# Altium PCB PV_PCB.PcbDoc (part 2 of 2)
Units mil, origin at the board's own origin, x right, y up, seen from the top; angles counter-clockwise.
Board outline 6100 x 4165 mil, 2 copper layers (Top Layer, Bottom Layer), stack 12.8 mil thick; 137 components, 94 nets, 414 pads, 55 vias.
Unrouted connection lines stored in the file: 34.
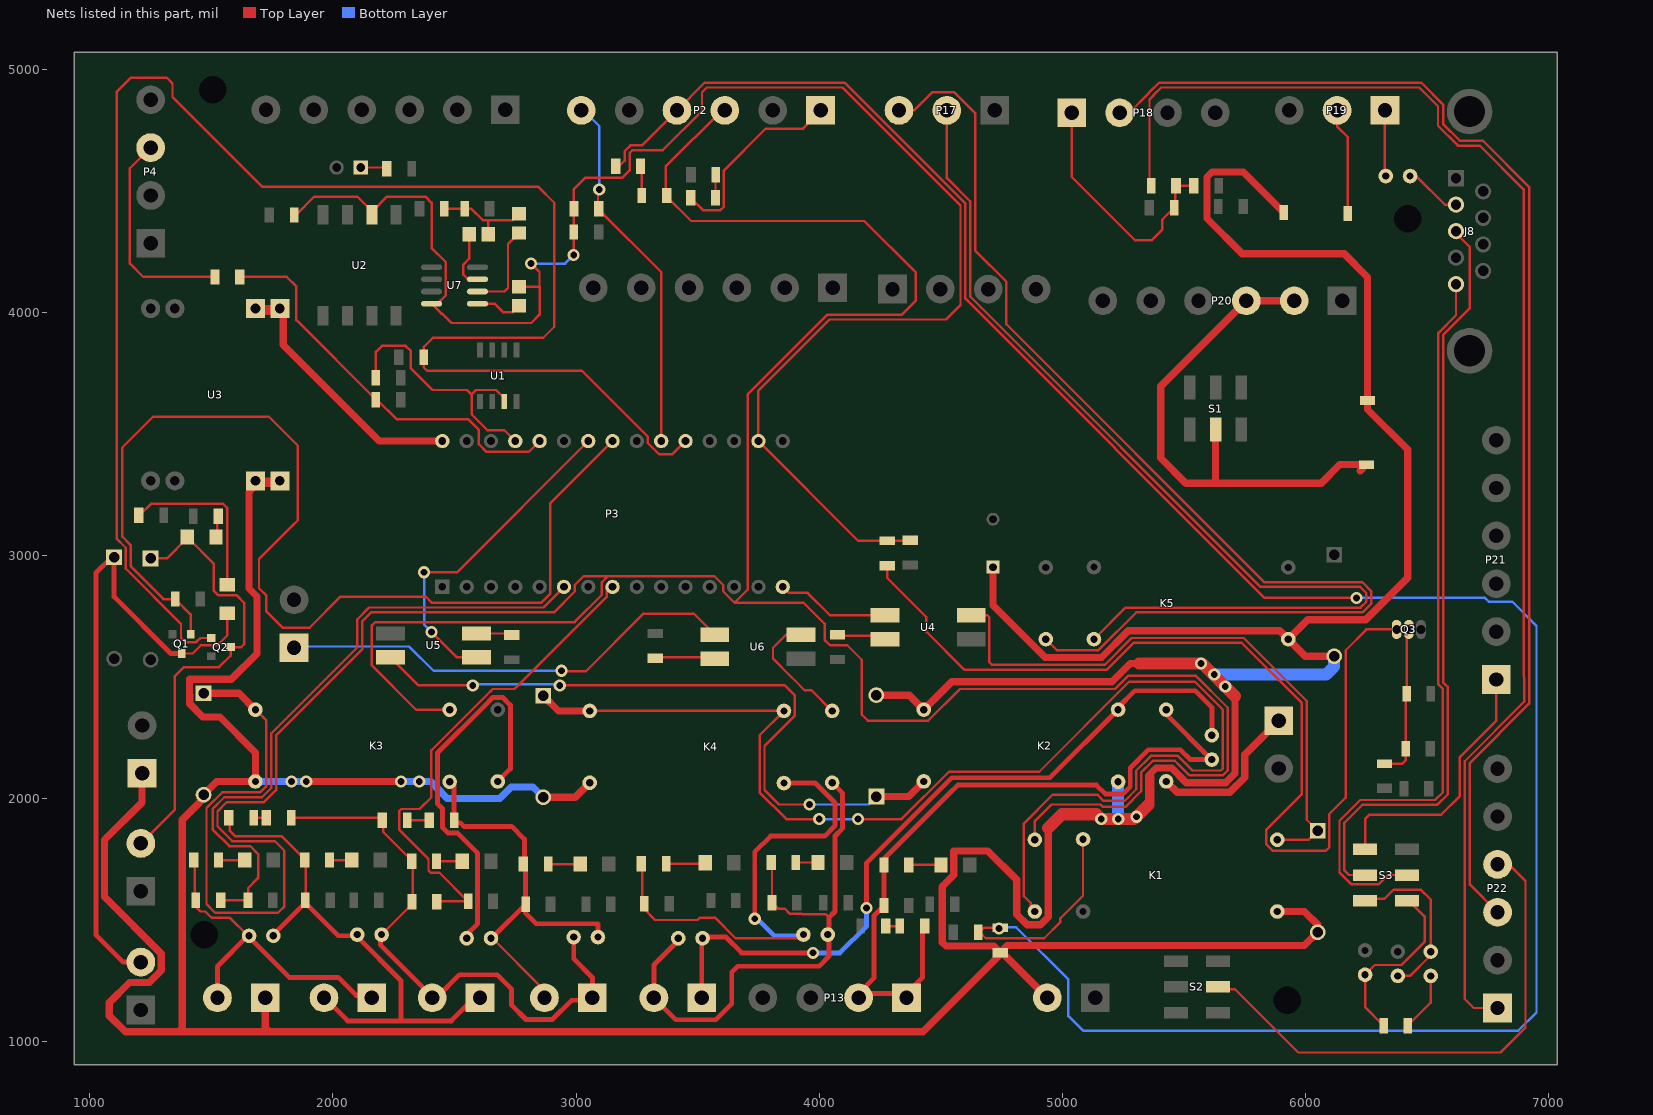
[diagram p2: the nets of this part, all layers, seen from the top]

## Via types
v1: diameter 50, hole 28, Top Layer to Bottom Layer, 55 vias

## Nets (pads, with @x,y where several pads share a name; then routed paths per layer and width w, separated by ;. In a path a pad name is that pad's centre, name@x,y a point inside that pad or via, vN(x,y) a via of type N, cw(c..) or ccw(c..) an arc to the next point about the centre after c; other vN are vias at no path point) (continued)
IMD_Status: P10.1 U6.1 | length 1908.8
  Top Layer w10: v1(2940,2525) 2941.72,2523.28 3040,2523.28 3276.72,2760 3484.09,2760 U6.1@3570.67,2673.43
  Bottom Layer w10: P10.1@1840,2620 1881.85,2620 1886.85,2625 2313.43,2625 2413.43,2525 v1(2940,2525)
LIM_MCU: P2.6 P3.21 R1.1 | length 1530.4
  Top Layer w10: v1(3095,4505) 3090,4500 3090,4425 3350,4165 P3.21@3350,3470 P3.21@3325,3470
  Bottom Layer w10: P2.6@3021.3,4830 3030,4830 3095,4765 v1(3095,4505)
LV_BATT+: C12.1 D6.2 D12.2 D13.2 D14.2 D16.2 F1.2 F2.2 K1.1 K2.1 K2.5 K3.2 K4.2 K5.1 P5.1 P11.1 P25.2 R37.1 U3.1 | length 21815.5
  Top Layer w20: D13.2@1467.87,2015.14 D13.2@1475,2008.01
  Top Layer w30: P5.1@1215,2103.15 1215,1984.5 1060,1829.5 1060,1595.72 1294.06,1361.67 1294.06,1292.03 1244.82,1242.8 1162.8,1242.8 1080,1160 1080,1106.53 1146.53,1040 1365,1040 ; D13.2@1467.87,2015.14 1522.45,2069.72 K3.2@1681,2069.72 1681,2189 1535,2335 1465.01,2335 1410.39,2389.63 1410.39,2426.59 1409.94,2427.03 1409.94,2489.94 1581.85,2489.94 1687.34,2595.43 1687.34,2830.81 1655,2863.15 1655,3260 U3.1@1695,3300 ; D13.2@1475,2008.01 1425,1958.01 1425,1957.57 1380,1912.57 1380,1055 1365,1040 ; P11.1@1721.85,1180 1721.85,1058.15 1740,1040 ; v1(1890,2070) v1(2280,2070) ; D14.2@2865,2005 2996.28,2005 K4.2@3056,2064.72 ; D12.2@4235,2425 4370.28,2425 K2.1@4430,2365.28 4544.72,2480 5203.99,2480 5278.99,2555 5315,2555 ; C12.1@4715,2951.57 4715,2794.23 4929.23,2580 5161.07,2580 5271.07,2690 5894,2690 K5.1@5929,2655 ; P25.2@4938.15,1180 R37.1@4748.15,1370 ; 4942.02,1878.22 4942.02,1512.22 4909.8,1480 4855,1480 4812,1523 4812,1665.01 4693.5,1783.5 4553.5,1783.5 4553.5,1684.72 4506.38,1637.59 4506.38,1408.14 4521.02,1393.5 4717.56,1393.5 R37.1@4745,1366.06 ; 5353.99,2093.99 5385,2125 5449.78,2125 5509.78,2065 5671.92,2065 5680.71,2073.79 5710,2103.08 5710,2420 ; v1(5570,2555) v1@5575,2555 ; K1.1@5884,1535 5995,1535 6050,1480 D6.2@6050,1450 5995,1395 4773.15,1395 R37.1@4748.15,1370 ; F2.2@5910,4410 5743.5,4576.5 5615.35,4576.5 5595,4556.15 5595,4385 5740,4240 6159.02,4240 6255,4144.02 F1.2@6255,3636.89 6255,3600 6420,3435 6420,2907.72 6247.28,2735 6009,2735 K5.1@5929,2655 ; D16.2@6117.87,2585.14 5998.86,2585.14 K5.1@5929,2655 ; 1365,1040 1740,1040 ; 1740,1040 4427.11,1040 4745,1357.89 R37.1@4745,1366.06 ; R37.1@4745,1366.06 4745,1370 R37.1@4748.15,1370
  Top Layer w40: U3.1@1695,3300 U3.1@1795,3300 ; 5353.99,1973.99 5358.99,1978.99 5358.99,2088.99
  Top Layer w50: 4942.02,1878.22 4998.79,1935 5140,1935 v1(5160,1915) v1(5230,1915) 5295,1915 v1(5305,1925) 5353.99,1973.99 ; 5315,2555 v1(5570,2555) ; v1@5575,2555 v1(5670,2460) 5710,2420
  Bottom Layer w30: K3.2@1681,2069.72 1839.72,2069.72 v1@1839.45,2070 ; v1(1830,2070) v1@1839.45,2070 ; v1@1899.72,2070 v1(1890,2070) v1@1839.45,2070 ; v1(2280,2070) v1(2355,2070) 2402.22,2070 2424.99,2047.23 2424.99,2045.6 2470.6,2000 2686.06,2000 2733,2046.94 2823.06,2046.94 D14.2@2865,2005
  Bottom Layer w50: v1@5228.99,1916.01 K2.5@5228.99,2068.66 ; v1(5625,2510) 6085,2510 6117.87,2542.87 D16.2@6117.87,2585.14
MC_RX: P19.1 P28.1 | length 283
  Top Layer w10: P28.1@6340,4575 6326.85,4588.15 P19.1@6326.85,4820.65 ; P19.1@6326.85,4820.65 6317.5,4820.65 6326.85,4830 P19.1@6326.85,4820.65
MC_TX: P21.1 S3.4 | length 1102.3
  Top Layer w10: S3.4@6245,1783.43 6245,1915 6263.5,1933.5 6558.11,1933.5 6635,2010.39 6635,2170 6785,2320 P21.1@6785,2489.45
MCU_HV_EN: P3.24 U5.1 | length 1385.4
  Top Layer w10: v1(2375,2930) 2510,2930 P3.24@3050,3470 ; v1(2405,2685) 2510,2580 U5.1@2590.79,2580
  Bottom Layer w10: v1(2375,2930) 2375,2715 v1(2405,2685)
MOTOR_TEMP: C9.2 P18.1 R44.1 R45.1 | length 1046.5
  Top Layer w10: P18.1@5038.78,4820 5038.78,4556.22 5300,4295 5366.57,4295 5410,4338.43 5410,4380 C9.2@5460,4430 5463.43,4433.43 5463.43,4520 R45.1@5545,4520
MSTR_SW_FDBK: P3.6 R25.1 R26.2 | length 2659.1
  Top Layer w10: R25.1@1534.21,1581.57 R26.2@1650.79,1581.57 1650.79,1630.79 1692.28,1672.28 1692.28,1771.29 1659.63,1803.94 1573.92,1803.94 1505,1872.86 1505,1956.84 1552.88,2004.72 1707.92,2004.72 1746,2042.8 1746,2267.57 2100,2621.57 2100,2736.62 2148.86,2785.47 2865.47,2785.47 P3.6@2950,2870
NetC2_2: C2.2 R4.2 | length 122.1
  Top Layer w10: R4.2@3265,4600 3270,4595 C2.2@3270,4480
NetC4_2: C4.2 R6.2 | length 95.7
  Top Layer w10: C4.2@3573.43,4470 3573.43,4563.43 R6.2@3575,4565
NetC5_1: C5.1 J1.1 J3.2 P8.1 P12.2 R19.1 R23.2 | length 2181.2
  Top Layer w10: C5.1@1575,1920 1575,1867.87 1598.94,1843.94 1790,1843.94 1887.36,1746.57 1887.36,1583.15 R23.2@1885.79,1581.57 R23.2@1885.79,1570.79
  Top Layer w20: J3.2@1750,1435 1885.79,1570.79 2021.57,1435 2095,1435 2280,1250 2280,1085 ; P12.2@1955,1190 2060,1085 2280,1085 ; P8.1@2579.17,1177.32 2486.85,1085 2280,1085
NetC5_2: C5.2 R15.1 | length 56.6
  Top Layer w10: C5.2@1673.43,1920 R15.1@1730,1920
NetC6_1: C6.1 J1.2 J2.1 P8.2 P9.1 R15.2 R22.1 R27.2 | length 2439.2
  Top Layer w10: R15.2@1828.43,1920 2196.57,1920 2206.57,1910 2206.57,1862.36 2327.36,1741.57 R27.2@2327.36,1575 ; J1.2@2195,1435 2325,1565 R27.2@2325,1575
  Top Layer w20: J1.2@2195,1435 2195,1398.15 2408.15,1185 2430,1185 2520,1275 2675,1275 2735,1215 2735,1150 2794.06,1090.94 2902.75,1090.94 2981.8,1170 3066.85,1170 3066.85,1263.7 2990.28,1340.28 J2.1@2990.28,1435
NetC6_2: C6.2 R16.1 | length 95
  Top Layer w10: C6.2@2305,1910 R16.1@2400,1910
NetC7_2: C7.2 R32.1 | length 61.6
  Top Layer w10: R32.1@4270,1475 C7.2@4331.57,1475
NetD1_1: D1.1 D3.2 P6.2 Q1.D | length 2676.9
  Top Layer w10: D1.1@1090,2992.32 D1.1@1100,2992.32 ; Q1.D@1377.4,2596.26 1423.41,2596.26 1456.4,2629.25 1523.93,2629.25 1565,2670.32 D3.2@1565,2770.79
  Top Layer w20: D1.1@1090,2992.32 1025,2927.32 1025,1440 1138.15,1326.85 P6.2@1210,1326.85 ; D1.1@1100,2992.32 1100,2829.06 1332.8,2596.26 Q1.D@1377.4,2596.26
NetD2_1: D2.1 D4.2 P7.2 Q2.D | length 1872.4
  Top Layer w10: P7.2@1210,1815 1350,1955 1350,2503.28 1386.66,2539.94 1531.66,2539.94 1578.74,2587.02 Q2.D@1578.74,2622.6 1622.6,2622.6 1635,2635 1635,2804.21 1602.71,2836.5 1527.29,2836.5 1510,2853.79 1510,2965 1402.5,3072.5 1317.32,2987.32 D2.1@1250,2987.32
NetD3_1: D3.1 R11.1 | length 711.9
  Top Layer w10: R11.1@1205,3165 1251.5,3211.5 1548.5,3211.5 1565,3195 D3.1@1565,2869.21
NetD4_1: D4.1 R12.1 | length 85.3
  Top Layer w10: R12.1@1523.43,3160 1523.43,3075.79 D4.1@1524.21,3075
NetD5_1: D5.1 R17.2 | length 140.8
  Top Layer w10: R17.2@2885.79,1730 D5.1@3026.57,1730
NetD6_1: D6.1 K1.2 U4.3 | length 2459.1
  Top Layer w10: U4.3@4625,2753.43 4691.57,2753.43 4699.06,2745.94 4699.06,2560.94 4710,2550 5175,2550 5285,2660 5745.89,2660 6005,2400.89 6005,1912.32 D6.1@6050,1867.32 6012.95,1830.28 K1.2@5884,1830.28
NetD7_1: D7.1 R18.2 | length 117.4
  Top Layer w10: R18.2@1529.21,1746.57 D7.1@1646.57,1746.57
NetD8_1: D8.1 R19.2 | length 100.8
  Top Layer w10: R19.2@1985.79,1746.57 D8.1@2086.57,1746.57
NetD9_1: D9.1 R22.2 | length 115.8
  Top Layer w10: R22.2@2425.79,1741.57 D9.1@2541.57,1741.57
NetD10_1: D10.1 R30.2 | length 180
  Top Layer w10: R30.2@3370.79,1731.57 D10.1@3550.79,1731.57
NetD11_1: D11.1 R31.2 | length 110.8
  Top Layer w10: R31.2@3904.21,1736.57 D11.1@4015,1736.57
NetD12_1: D12.1 K2.2 U5.3 | length 2913.9
  Top Layer w10: U5.3@2236.46,2580 2351.46,2465 v1(2575,2465) ; v1(2932.48,2465) 3859.05,2465 3900,2424.05 3900,2341.36 3775,2216.36 3775,2035 3835,1975 v1(3960,1975) v1@3975,1975
  Top Layer w30: D12.1@4235,2007.68 4367.68,2007.68 K2.2@4430,2070
  Bottom Layer w10: v1(2575,2465) 2579.8,2469.8 2927.68,2469.8 v1(2932.48,2465) v1@2937.28,2469.8 ; v1(3960,1975) 4202.32,1975 D12.1@4235,2007.68
NetD15_1: D15.1 R41.1 | length 145.8
  Top Layer w10: R41.1@4365,1726.57 D15.1@4510.78,1726.57
NetD17_2: D17.2 Q3.2 R47.2 R48.2 | length 636
  Top Layer w10: R47.2@6325,2143.43 6398.43,2143.43 6411.57,2156.57 R48.2@6411.57,2205 6411.57,2425 D17.2@6416.57,2430 6416.57,2686.57 Q3.2@6425,2695
NetF2_1: F2.1 P19.2 | length 442.1
  Top Layer w10: P19.2@6130,4830 6130,4763.78 6173.78,4720 F2.1@6173.78,4406.06
NetJ2_2: J2.2 J4.1 K3.5 P9.2 R16.2 R17.1 R20.2 | length 1718.5
  Top Layer w10: J4.1@2662.36,1435 2645.28,1435 2870,1210.28 P9.2@2870,1180 P9.2@2870,1170 ; R17.1@2787.36,1730 R17.1@2792.36,1725
  Top Layer w20: K3.5@2479.99,2068.39 2498.43,2049.95 R16.2@2498.43,1910 2508.43,1900 2522.72,1900 2537.72,1885 2735,1885 2787.36,1832.64 R17.1@2787.36,1730 ; J4.1@2662.36,1435 R20.2@2792.36,1565 ; R17.1@2792.36,1725 R20.2@2792.36,1565 ; J2.2@3090.28,1435 3090.28,1484.72 2835.28,1484.72 2792.36,1527.64 R20.2@2792.36,1565
NetJ3_1: J3.1 P11.2 P12.1 R18.1 R25.2 | length 1315.3
  Top Layer w10: R18.1@1430.79,1746.57 1430.79,1586.57 R25.2@1435.79,1581.57 ; R25.2@1435.79,1553.86 1454.64,1535 1475,1535 1498.5,1511.5 1499.62,1511.5 1501.04,1510.07 1574.93,1510.07 J3.1@1650,1435 ; P12.1@2121.57,1190 P12.1@2121.57,1195
  Top Layer w20: P11.2@1525,1180 1525,1310 1650,1435 1820.94,1264.06 2020.94,1264.06 2095,1190 P12.1@2121.57,1190
NetJ4_2: J4.2 K3.6 | length 1607.2
  Top Layer w20: J4.2@2545.28,1435 2595,1484.72 2595,1775 2511.5,1858.5 2472.43,1858.5 2450,1880.93 2450,1958.58 2429.99,1978.59 2429.99,2187.7 2623.64,2381.36 2657.27,2415 2698.69,2415 2730,2383.69 2730,2121.72 K3.6@2678,2069.72
NetJ5_1: J5.1 J6.2 K4.6 P14.2 R31.1 R35.2 | length 2418.2
  Top Layer w10: R31.1@3805.79,1736.57 R35.2@3805.79,1571.57 3830.4,1546.97 3858.39,1546.97 3880.28,1525.07 3928.14,1525.07 3928.65,1524.57 4025.43,1524.57 4040,1510
  Top Layer w20: J6.2@3435,1430 3320,1315 P14.2@3320,1180 3410,1090 3575,1090 3640,1155 3640,1284.72 3665.28,1310 4000,1310 4040,1350 4040,1435 4040,1510 4065,1535 4065,1845.65 4095,1875.65 4095,2022.72 K4.6@4053,2064.72
NetJ5_2: J5.2 K4.5 R30.1 R33.2 | length 2133.3
  Top Layer w10: R30.1@3272.36,1731.57 3272.36,1575 R33.2@3280.79,1566.57 3280.79,1544.21 3325,1500 3499.21,1500 3509.21,1510 3571.34,1510 3656.34,1425 3930,1425 J5.2@3940,1435
  Top Layer w20: v1(3735,1505) 3735,1780 3800,1845 4021.92,1845 4065,1888.08 4065,1982.01 3983.63,2063.39 K4.5@3854.99,2063.39
  Bottom Layer w20: v1(3735,1505) 3745,1505 3815,1435 J5.2@3940,1435
NetJ6_1: J6.1 J7.2 K2.3 P14.1 | length 3116.2
  Top Layer w20: P14.1@3516.85,1180 3516.85,1411.85 3535,1430 3615.99,1430 3680.99,1365 v1(3975,1365) ; v1(4195,1550) 4195,1735 4545,2085 4948.72,2085 K2.3@5229,2365.28 5229,2374 5297.84,2442.84 5546.81,2442.84 5615,2374.64 J7.2@5615,2260
  Bottom Layer w20: v1(3975,1365) 4085,1365 4195,1475 v1(4195,1550) v1@4190,1550
NetJ8_2: J8.2 P28.2 | length 237.9
  Top Layer w10: P28.2@6430,4560 6455,4560 6572.87,4442.13 J8.2@6619.09,4442.13
NetJ8_3: J8.3 S3.5 | length 3151.8
  Top Layer w10: S3.5@6245,1685 6179.24,1685 6160,1704.24 6160,1900 6233.5,1973.5 6541.54,1973.5 6585,2016.96 6585,2458.71 6566.3,2477.41 6566.3,3906.3 6675,4015 6675,4268.98 J8.3@6615,4328.98
NetK4_4: K4.4 U6.3 | length 514.2
  Top Layer w10: U6.3@3925,2673.43 3863.43,2673.43 3810,2620 3810,2575 3884.98,2500.02 3901.18,2483.83 3940,2445 3967.98,2445 K4.4@4052.98,2360
NetK5_3: K5.3 P17.2 | length 4159.7
  Top Layer w10: P17.2@4525,4830 4525,4551.57 4620.94,4455.62 4620.94,4064.33 4664.33,4020.94 5815.27,2870 6225,2870 6250,2845 6250,2808.43 6226.57,2785 5260,2785 K5.3@5130,2655
NetK5_4: K5.4 P17.3 | length 4743.8
  Top Layer w10: P17.3@4328.15,4830 4390,4830 4464.06,4904.06 4555.67,4904.06 4640.94,4818.78 4640.94,4253.78 4769.06,4125.67 4769.06,3950.94 5830,2890 6233.28,2890 6270,2853.28 6270,2800.15 6234.85,2765 5303.64,2765 5148.64,2610 4977.02,2610 K5.4@4932.02,2655
NetP3_30: P3.30 U3.3 | length 1062.3
  Top Layer w30: U3.3@1795,4008.66 1795,3865 2190,3470 P3.30@2450,3470
  Top Layer w40: U3.3@1695,4008.66 U3.3@1795,4008.66
NetP4_3: P4.3 R10.2 | length 895.6
  Top Layer w10: P4.3@1260,4665 1251.72,4665 1244.93,4671.78 1165,4591.85 1165,4200 1220,4145 R10.2@1515,4145
NetP22_4: P22.4 S2.5 | length 2171.3
  Top Layer w10: S2.5@5640,1225 5640,1215 5710,1215 5970,955 6802.74,955 6905,1057.26 6905,1660 6836.3,1728.7 P22.4@6790,1728.7
NetP24_1: P24.1 R5.1 | length 108.1
  Top Layer w10: P24.1@2115,4595 2216.06,4595 R5.1@2221.06,4590
NetP26_1: P26.1 R51.1 | length 244.4
  Top Layer w10: R51.1@6420,1065 6515,1160 P26.1@6515,1270
NetP26_2: P26.2 P27.1 S3.6 | length 702.2
  Top Layer w10: S3.6@6245,1586.57 6324.18,1586.57 6362.8,1625.2 6473.65,1625.2 6515,1583.85 P26.2@6515,1370 6515,1355 6430,1270 P27.1@6380,1270
NetP29_1: P29.1 R51.2 S3.1 | length 748.9
  Top Layer w10: R51.2@6321.57,1065 6245,1141.57 P29.1@6245,1275 6285,1315 6395,1315 6490,1410 6490,1514.8 S3.1@6418.23,1586.57
NetQ3_3: Q3.3 R46.1 | length 4100.6
  Top Layer w10: R46.1@4280,2961.57 R46.1@4280,2957.64 4280,2906.72 4440,2746.72 4440,2686.01 4596.01,2530 5183.28,2530 5293.28,2640 5737.61,2640 5985,2392.61 5985,2017.66 5839,1871.66 5839,1810.64 5864.36,1785.28 6084.13,1785.28 6097.48,1798.63 6097.48,1935.76 6165.35,2003.63 6165.35,2609.66 6250.69,2695 Q3.3@6375,2695
NetR29_1: R29.1 U4.2 | length 235.4
  Top Layer w10: R29.1@4055,2680 4065,2670 4075,2670 4255.67,2670 U4.2@4270.67,2655 U4.2@4270.67,2664.33
NetR42_1: R42.1 U5.2 | length 148.4
  Top Layer w10: U5.2@2590.79,2678.43 2725,2678.43 R42.1@2735,2668.43
NetR43_1: R43.1 U6.2 | length 247.7
  Top Layer w10: R43.1@3325,2580 3565.67,2580 U6.2@3570.67,2575
NetSB1_1: SB1.1 U7.1 | length 225.1
  Top Layer w10: U7.1@2565,4035 U7.1@2594.49,4035 2665,4035 2700,4000 2739.37,4000 SB1.1@2765,4025.63
NetSB2_1: SB2.1 U7.2 | length 415.5
  Top Layer w10: U7.2@2555,4085 2705,4085 2720,4100 2720,4280.63 SB2.1@2765,4325.63
NetSB3_1: SB3.1 U7.3 | length 240.4
  Top Layer w10: SB3.1@2560.63,4320 2560.63,4220.55 2536.18,4196.11 2536.18,4153.82 2555,4135 U7.3@2592.52,4135
PB_N04: C4.1 P2.1 | length 814.2
  Top Layer w10: C4.1@3471.06,4470 3521.22,4419.84 3593.7,4419.84 3607.72,4433.86 3607.72,4582.72 3780,4755 3933.7,4755 4005.55,4826.85 P2.1@4005.55,4830
PB_NO1: K1.5 P2.4 R4.1 R37.2 R40.2 | length 10029.8
  Top Layer w10: R4.1@3166.57,4600 3176.72,4600 3200,4623.28 3200,4662.71 3223.43,4686.14 3271.14,4686.14 P2.4@3415,4830 3529.06,4944.06 4104.23,4944.06 4600.94,4447.34 4600.94,4056.04 5831.99,2825 v1(6210,2825) ; R37.2@4745,1468.43 4678.43,1468.43 4660,1450 4685,1425 4925.51,1425 4992.02,1491.51 4992.02,1507.02 5085.01,1600.01 K1.5@5085.01,1831.61
  Bottom Layer w10: v1@4750,1470 4810,1470 5025,1255 5025,1105 5085,1045 6875,1045 6950,1120 6950,2710 6850.91,2809.09 6754.33,2809.09 6738.42,2825 v1(6210,2825)
  other v1: 4740,1465
PB_NO2: C2.1 D13.1 K1.6 K3.1 K3.3 P2.3 | length 13964.8
  Top Layer w10: K3.1@1681,2365 1726,2320 1726,2051.08 1699.64,2024.72 1544.6,2024.72 1480,1960.13 1480,1565.36 1515.28,1530.07 1583.21,1530.07 1583.28,1530 1773.97,1530 1800,1556.03 1800,1785 1761.06,1823.94 1586.59,1823.94 1525,1885.52 1525,1946.72 1563.01,1984.72 1716.21,1984.72 1766,2034.52 1766,2259.28 2120,2613.28 2120,2728.33 2157.14,2765.47 2908.44,2765.47 2994.53,2851.56 2994.53,2877.5 3031.56,2914.53 3131.56,2914.53 ; K3.3@2480,2365 2341.66,2365 2160,2546.66 2160,2711.76 2173.71,2725.47 2993.92,2725.47 3105.47,2837.03 3105.47,2888.44 3131.56,2914.53 ; P2.3@3611.85,4830 3600,4830 3368.43,4598.43 3368.43,4480 3473.43,4375 4185.38,4375 4397.5,4162.88 4397.5,4047.5 4340,3990 4034.02,3990 3705.47,3661.46 3705.47,2858.44 3652.03,2805 ; K1.6@4887,1830.28 4887,1907 4955,1975 5156.57,1975 5166.57,1965 5259.68,1965 5323.99,2029.31 5323.99,2106.42 5372.57,2155 5462.21,2155 5479.78,2137.43 5522.21,2095 5659.5,2095 5668.28,2103.79 5680,2115.5 5680,2373.28 5548.28,2505 5271.42,2505 5216.42,2450 4578.36,2450 4448.64,2320.28 4199.72,2320.28 4175,2345 4175,2570.29 4115.29,2630 4044.57,2630 4022.15,2652.42 4022.15,2718.73 3935.89,2805 3652.03,2805 ; 3131.56,2914.53 3568.44,2914.53 3605.47,2877.5 3605.47,2851.56 3652.03,2805
  Top Layer w30: D13.1@1467.87,2432.46 1613.54,2432.46 K3.1@1681,2365
PB_NO4: D14.1 K1.4 K4.1 K4.3 | length 5243.8
  Top Layer w10: K4.1@3056,2360 K4.3@3825,2360 ; K4.3@3855,2360 3755,2260 3755,2025 3865,1915 v1(4000,1915) ; v1(4160,1915) 4338.64,1915 4533.64,2110 4904.71,2110 5274.71,2480 5545,2480 5660,2365 5660,2123.79 5651.21,2115 5535,2115 5475,2175 5364.29,2175 5303.99,2114.7 5303.99,2037.6 5256.4,1990 5169.85,1990 5144.85,2015 4960,2015 4842,1897 4842,1597.85 4869.72,1570.13 4869.72,1552.29 K1.4@4887.02,1535
  Top Layer w30: D14.1@2865,2422.32 2927.32,2360 K4.1@3056,2360
  Bottom Layer w10: v1(4000,1915) v1(4160,1915)
PB_Reset: P3.15 U4.1 | length 469
  Top Layer w10: P3.15@3850,2870 3874.53,2845.47 3951.98,2845.47 4044.03,2753.43 U4.1@4270.67,2753.43
POS3V3: C1.2 C11.1 P3.17 R1.2 R2.2 R3.2 R7.2 R46.2 SB1.2 SB2.2 SB3.2 U2.2 U7.8 | length 7244
  Top Layer w10: R7.2@1840,4400 1847.75,4400 1922.86,4475.12 2099.88,4475.12 2160,4415 U2.2@2160,4412.25 ; U2.2@2160,4399.96 U2.2@2160,4412.25 ; R2.2@2458.43,4425 R3.2@2541.57,4425 2569.57,4425 2616.07,4378.5 2640,4378.5 ; SB3.2@2639.37,4320 2639.37,4377.87 2640,4378.5 ; SB1.2@2765,4104.37 2849.37,4104.37 ; SB2.2@2765,4404.37 2739.13,4378.5 2640,4378.5 ; v1(2815,4200) 2849.37,4165.63 2849.37,4104.37 ; v1(2990,4235) 2990,4505 3038.5,4553.5 3190.5,4553.5 3220,4583 3220,4654.43 3231.72,4666.14 3355.87,4666.14 3517.79,4828.06 3517.79,4904.51 3537.34,4924.06 4095.94,4924.06 4580.94,4439.06 4580.94,4029.06 4521.89,3970 4042.3,3970 3750,3677.7 P3.17@3750,3470 4160,3060 R46.2@4280,3060 4373.43,3060 C11.1@4375,3058.43 ; U2.2@2160,4412.25 2222.86,4475.12 2380.31,4475.12 2405.71,4449.72 2405.71,4264 2463.82,4205.89 2463.82,4068.82 2430,4035 U7.8@2405.51,4035 2446.14,3994.37 2448.11,3994.37 2487.01,3955.47 2815.47,3955.47 2850,3990 2850,4105 2849.37,4104.37
  Bottom Layer w10: v1@2820,4200 2955,4200 v1(2990,4235)
POS5V: C3.2 P3.27 U1.3 | length 1111.9
  Top Layer w10: C3.2@2176.57,3730 2176.57,3836.57 2201.5,3861.5 2298.93,3861.5 2320.71,3839.72 2320.71,3769 2409.71,3680 2550.94,3680 2570,3660.94 ; U1.3@2705,3632.4 2705,3645.94 2670.94,3680 2589.06,3680 2570,3660.94 ; P3.27@2750,3470 2705.47,3514.53 2635.47,3514.53 2570,3580 2570,3660.94
POS12_OUT: C7.1 J7.1 K2.4 P13.1 P13.2 R38.2 R41.2 | length 2985
  Top Layer w10: R41.2@4266.57,1726.57 R41.2@4266.57,1751.58
  Top Layer w20: R41.2@4266.57,1726.57 4266.57,1557.93 4225,1516.36 4225,1260.67 4161.85,1197.52 4358.7,1197.52 4425,1263.82 C7.1@4425,1455 ; R41.2@4266.57,1751.58 4533.66,2018.66 4570,2055 5140.21,2055 5176.55,2018.66 5249.7,2018.66 5278.99,2047.95 5278.99,2125.06 5353.93,2200 5485.36,2200 5525.36,2160 5612.57,2160 5426.98,2345.59 K2.4@5426.98,2365.28
"Program Select": J8.5 S3.2 | length 3128.2
  Top Layer w10: S3.2@6418.23,1685 6339.05,1685 6300.43,1646.38 6189.57,1646.38 6140,1695.95 6140,1908.28 6225.22,1993.5 6533.26,1993.5 6565,2025.24 6565,2450.43 6546.3,2469.13 6546.3,3914.58 6619.09,3987.38 J8.5@6619.09,4114.96
PUMP_OUT: K2.6 P23.1 | length 658.6
  Top Layer w30: K2.6@5427,2070 5472,2025 5688.49,2025 5750,2086.51 5750,2180 P23.1@5890,2320
PV_LIM_FDBK: P3.8 R27.1 R28.2 | length 2056.3
  Top Layer w10: R27.1@2439.21,1576.57 R28.2@2555.79,1576.57 2437.29,1695.07 2401.86,1695.07 2393.07,1703.86 2393.07,1751.5 2272.28,1872.29 2272.28,1947.71 2281.07,1956.5 2356.5,1956.5 2404.99,2004.99 2404.99,2198.07 2646.92,2440 2647.43,2440 2657.43,2450 2746.57,2450 2861.57,2565 ; 2885,2588.43 2861.57,2565 ; P3.8@3150,2870 3125.47,2870 3125.47,2828.74 2861.57,2564.84 2861.57,2565
Ready_Power: F1.1 P20.2 P20.3 S1.5 | length 2117.7
  Top Layer w30: S1.5@5630,3516.77 5630,3296.89 ; P20.3@5756.85,4046.85 5405,3695 5405,3400 5508.11,3296.89 5630,3296.89 ; P20.3@5805,4046.85 P20.2@5953.7,4046.85 ; 6225.51,3347.56 F1.1@6251.06,3373.11 6141.22,3373.11 6065,3296.89 5630,3296.89
RTD1: P18.2 P22.3 | length 5091.8
  Top Layer w10: P18.2@5235.63,4820 5274.85,4820 5355,4900.15 5355,4900.77 5398.29,4944.06 6475.94,4944.06 6566.3,4853.7 6566.3,4773.7 6635,4705 6729.38,4705 6920,4514.38 6920,4510 6920,2510 6920,2389.8 6675.94,2145.74 6675.94,1645.91 P22.3@6790,1531.85
SOL1: P3.23 Q1.G R13.2 | length 4504.8
  Top Layer w10: Q1.G@1414.8,2675 1414.8,2756.77 R13.2@1351.57,2820 1302.86,2820 1167.48,2955.38 1167.48,3042.52 1133.1,3076.9 1133.1,3443.1 1260,3570 1736.72,3570 1855,3451.72 1855,3143.15 1835.92,3124.08 ; 1835.93,3124.07 1695.94,2984.09 1695.94,2864.63 1725.94,2834.63 1725.94,2769.61 1792.76,2702.8 1904.36,2702.8 2031.57,2830 2381.45,2830 2405.98,2805.47 2857.19,2805.47 2894.53,2842.81 2894.53,3214.53 P3.23@3150,3470
SOL2: P3.20 Q2.G R14.2 | length 6997.1
  Top Layer w10: Q2.G@1500,2660 1454.48,2660 1439.4,2644.92 ; P3.20@3450,3470 3395,3415 3342.03,3415 3294.53,3462.5 3294.53,3488.44 3023.48,3759.49 2386.79,3759.49 2373.43,3772.85 R14.2@2373.43,3815 2373.43,3857.15 2411.28,3895 2865,3895 2910,3940 2910,4450 2844.88,4515.12 1709.88,4515.12 1340,4885 1340,4941.17 1316.17,4965 1170,4965 1110,4905 1110,3068.5 1147.48,3031.02 1147.48,2945 1375,2717.48 1375,2660.13 1392.84,2642.28 1436.76,2642.28 ; 1436.76,2642.28 1439.4,2644.92 ; 1436.76,2642.28 1439.4,2644.92
VD2: P3.26 R9.2 R10.1 | length 1681.5
  Top Layer w10: R10.1@1613.43,4145 R10.1@1617.36,4145 1810,4145 1849.37,4105.63 1849.37,3967.2 R9.2@2176.58,3640 ; R9.2@2181.57,3658.43 2181.57,3640 2261.57,3560 2555,3560 2600,3515 2600,3457.03 2631.56,3425.47 2805.47,3425.47 P3.26@2850,3470
XDCR_PWR: P22.1 R44.2 | length 5720.4
  Top Layer w10: R44.2@5365,4520 5358.42,4526.58 5358.42,4875.29 5375,4891.86 5375,4892.48 5406.57,4924.06 6467.66,4924.06 6545,4846.72 6545,4766.72 6626.72,4685 6716.72,4685 6896.9,4504.81 6896.9,2519.57 6896.9,2500.43 6900,2497.34 6900,2398.08 6655,2153.08 6655,1175 6691.85,1138.15 P22.1@6790,1138.15
pads on no net: J8.1 J8.4 J8.6 J8.7 J8.8 J8.9 J8.10 J8.11 K5.5 K5.6 P3.3 P3.16 P3.18 P3.19 P3.28 S1.1 S1.2 S1.3 S1.4 S2.1 S2.2 S2.3 S2.6 U1.5 U2.5 U2.6 U2.7 U2.8 U7.7
copper on no net:
  other v1: 2356.06,4310

## Polygon pours and split planes (outlines as drawn)
no net on Top Layer "Bottom Layer-GND" (solid, pour order 4): 1005,1015
no net on Bottom Layer "Bottom Layer-No Net" (solid, pour order 24): 1625,4390
no net on Bottom Layer "Bottom Layer-GND" (solid, pour order 14): 1305,5010
no net on Bottom Layer "Bottom Layer-GND" (solid, pour order 12): 1270,5035
no net on Bottom Layer "Bottom Layer-GND" (solid, pour order 8): 8505,2855

## Other copper
Bottom Layer:
  pour cut-out: 2890,5030.02
  pour cut-out: 1605,4482.87

## Silkscreen, mask and mechanical layers (free items; w line width, h text height)
Top Overlay:
  lines w10: 3415,4984.96 3415,5055 3610,5055 3610,4990 ; 3805,4989.96 3805,5060 4000,5060 4000,4995
  text "----CAN LOW----" at 1685,5020 h30
  text "----CAN HIGH----" at 2290,5020 h30
  text "LIM   GND" at 2975,5020 h30
  text "PB" at 3875,5020 h30
  text "FAN-IN   FAN-OUT   GND" at 4195,5020 h30
  text "TEMP  RTD    --GND---" at 5020,5020 h30
  text "GND   MCPOWER   MC-RX" at 5830,5020 h30
  text "PB" at 3485,5015 h30
  text "MC Programming" at 6550,4960 h30
  text "GND   VD1   GND    HVDMCU" at 990,4935 h30 r270
  text "BMS FAN" at 4605,4620 h30
  text "MC POWER" at 6050,4620 h30
  text "MC TEMP" at 5186.72,4605 h30
  text "LIMIT SWITCHES" at 3755,4600 h30
  text "Motor Cont. Fuse" at 5820,4240 h30
  text "THERM EXPANSION" at 4405,3855 h30
  text "CAN HEADER 2" at 3385,3840 h30
  text "ENABLE" at 5900,3520 h30 r90
  text "HV BAT CHARGE" at 5845,3420 h30 r90
  text "OFF" at 5470,3360 h60
  text "ON" at 5680,3360 h60
  text "BMS 1A FUSE" at 6075,3330 h30 r90
  text "HVD/IMD" at 1990,3090 h30 r90
  text "GND   LV_BATT+ IN" at 970,2475 h30 r270
  text "MC-TX  ---GND---    AIN2   GND   CAN1H" at 7015,2420 h30 r90
  text "MCU" at 5575,2065 h30
  text "GND     PUMP" at 6125,2045 h30 r90
  text "PROG SEL" at 6305,1860 h30
  text "SOLENOID 2" at 965,1840 h30 r270
  text "MC" at 6585,1730 h60 r90
  text "BMS" at 6585,1530 h60 r90
  text "SOLENOID 1" at 965,1375 h30 r270
  text "PROG  OFF" at 5770,1095 h30 r90
  text "TERM" at 6470,1085 h30
  text "MC-POW  GND  RTD   PROG EN  DIN8  CANL" at 7020,1040 h30 r90
  text "MC PROGRAM" at 5415,1025 h30
  text "ENABLE" at 5460,980 h30
  text "LV BATT +   GND" at 4790,950 h30
  text "HV MASTER" at 1580,940 h30
  text "ESTOP" at 2000,940 h30
  text "PV LIMIT SWITCH" at 2305,940 h30
  text "HVD" at 2920,940 h30
  text "INERTIA SWITCH" at 3225,940 h30
  text "--GND--" at 3755,940 h30
  text "Contactor 12V" at 4085,940 h30

## Text inside footprints (layer, text, board x,y; h text height)
D3: Top Overlay "+" at 1561.06,2733.39 h39.37 r270
D4: Top Overlay "+" at 1373.39,3078.94 h39.37 r180
D5: Top Overlay "+" at 3162.4,1726.06 h39.37
D7: Top Overlay "+" at 1782.4,1742.63 h39.37
D8: Top Overlay "+" at 2222.4,1742.63 h39.37
D9: Top Overlay "+" at 2677.4,1737.63 h39.37
D10: Top Overlay "+" at 3676.61,1731.06 h39.37
D11: Top Overlay "+" at 4140.67,1732.64 h39.37
D15: Top Overlay "+" at 4646.61,1722.63 h39.37
D17: Top Overlay "+" at 6363.43,2410.32 h39.37 r180
J8: Top Overlay "6" at 6853.15,4516.34 h59.06 r270; Top Overlay "9" at 6853.15,4189.17 h59.06 r270; Top Overlay "5" at 6483.07,4134.65 h59.06 r270; Top Overlay "1" at 6483.07,4561.02 h59.06 r270
K1: Top Overlay "A1" at 5923,1656 h60 r180; Top Overlay "A2" at 5930,1776 h60 r180; Top Overlay "11" at 5113,1650 h60 r180; Top Overlay "21" at 5123,1771 h60 r180; Top Overlay "14" at 4929,1648 h60 r180; Top Overlay "24" at 4939,1773 h60 r180
K2: Top Overlay "A1" at 4391,2244.28 h60; Top Overlay "A2" at 4384,2124.28 h60; Top Overlay "11" at 5201,2250.28 h60; Top Overlay "21" at 5191,2129.28 h60; Top Overlay "14" at 5385,2252.28 h60; Top Overlay "24" at 5375,2127.28 h60
K3: Top Overlay "24" at 2626,2127 h60; Top Overlay "14" at 2636,2252 h60; Top Overlay "21" at 2442,2129 h60; Top Overlay "11" at 2452,2250 h60; Top Overlay "A2" at 1635,2124 h60; Top Overlay "A1" at 1642,2244 h60
K4: Top Overlay "24" at 4001,2122 h60; Top Overlay "14" at 4011,2247 h60; Top Overlay "21" at 3817,2124 h60; Top Overlay "11" at 3827,2245 h60; Top Overlay "A2" at 3010,2119 h60; Top Overlay "A1" at 3017,2239 h60
K5: Top Overlay "A1" at 5968,2776 h60 r180; Top Overlay "A2" at 5975,2896 h60 r180; Top Overlay "11" at 5158,2770 h60 r180; Top Overlay "21" at 5168,2891 h60 r180; Top Overlay "14" at 4974,2768 h60 r180; Top Overlay "24" at 4984,2893 h60 r180
P3: Top Overlay "USB" at 2268.9,3106.22 h60 r90; Top Overlay "RST" at 4064.17,3090.47 h60 r90; Top Overlay "Nucleo-32" at 3520.87,3228.27 h100 r180
U2: Top Overlay "o" at 2019.84,4114.92 h60 r180
U3: Top Overlay "Buck conv." at 1529.53,3404.76 h60 r90; Top Overlay "IN-" at 1328.74,3381.14 h60 r90; Top Overlay "OUT-" at 1328.74,3731.53 h60 r90; Top Overlay "IN+" at 1761.81,3381.14 h60 r90; Top Overlay "OUT+" at 1761.81,3723.66 h60 r90